# Altium PCB PCB1.PcbDoc
Units mil, origin at the board's own origin, x right, y up, seen from the top; angles counter-clockwise.
Board outline 6000 x 4000 mil, 2 copper layers (Top Layer, Bottom Layer); 30 components, 46 nets, 130 pads, 0 vias.
Unrouted connection lines stored in the file: 79.
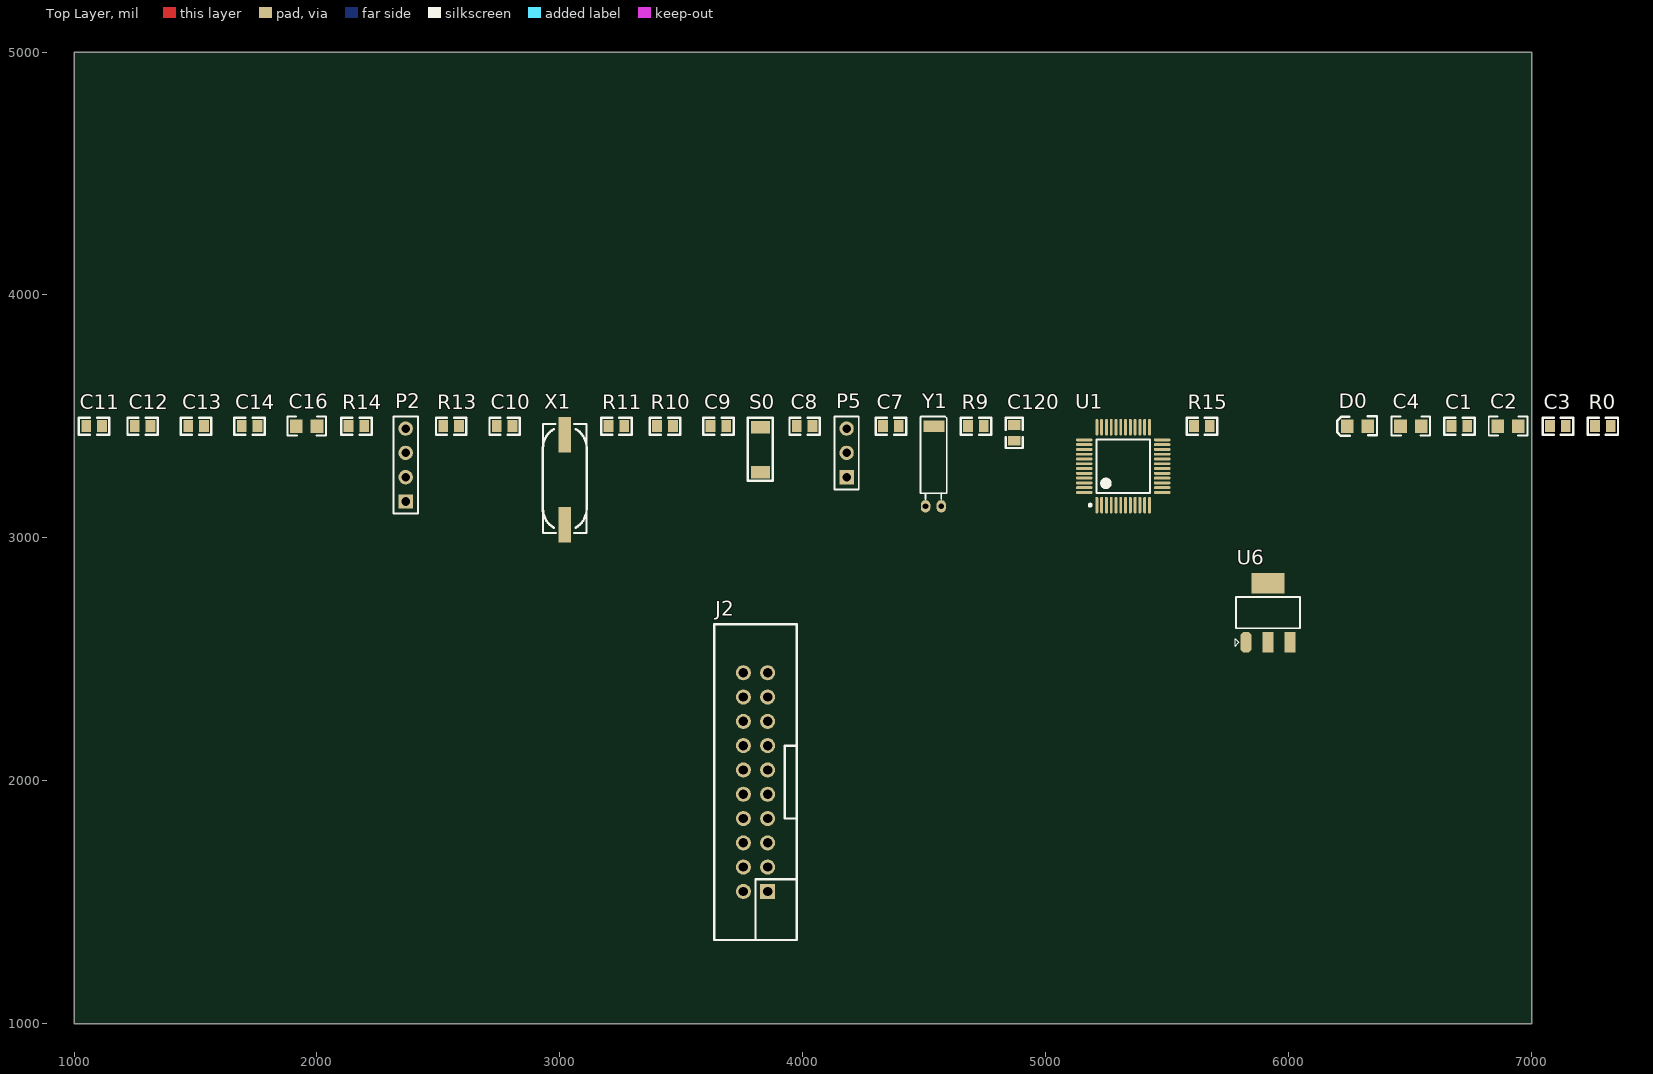
[diagram p0: Top Layer view]
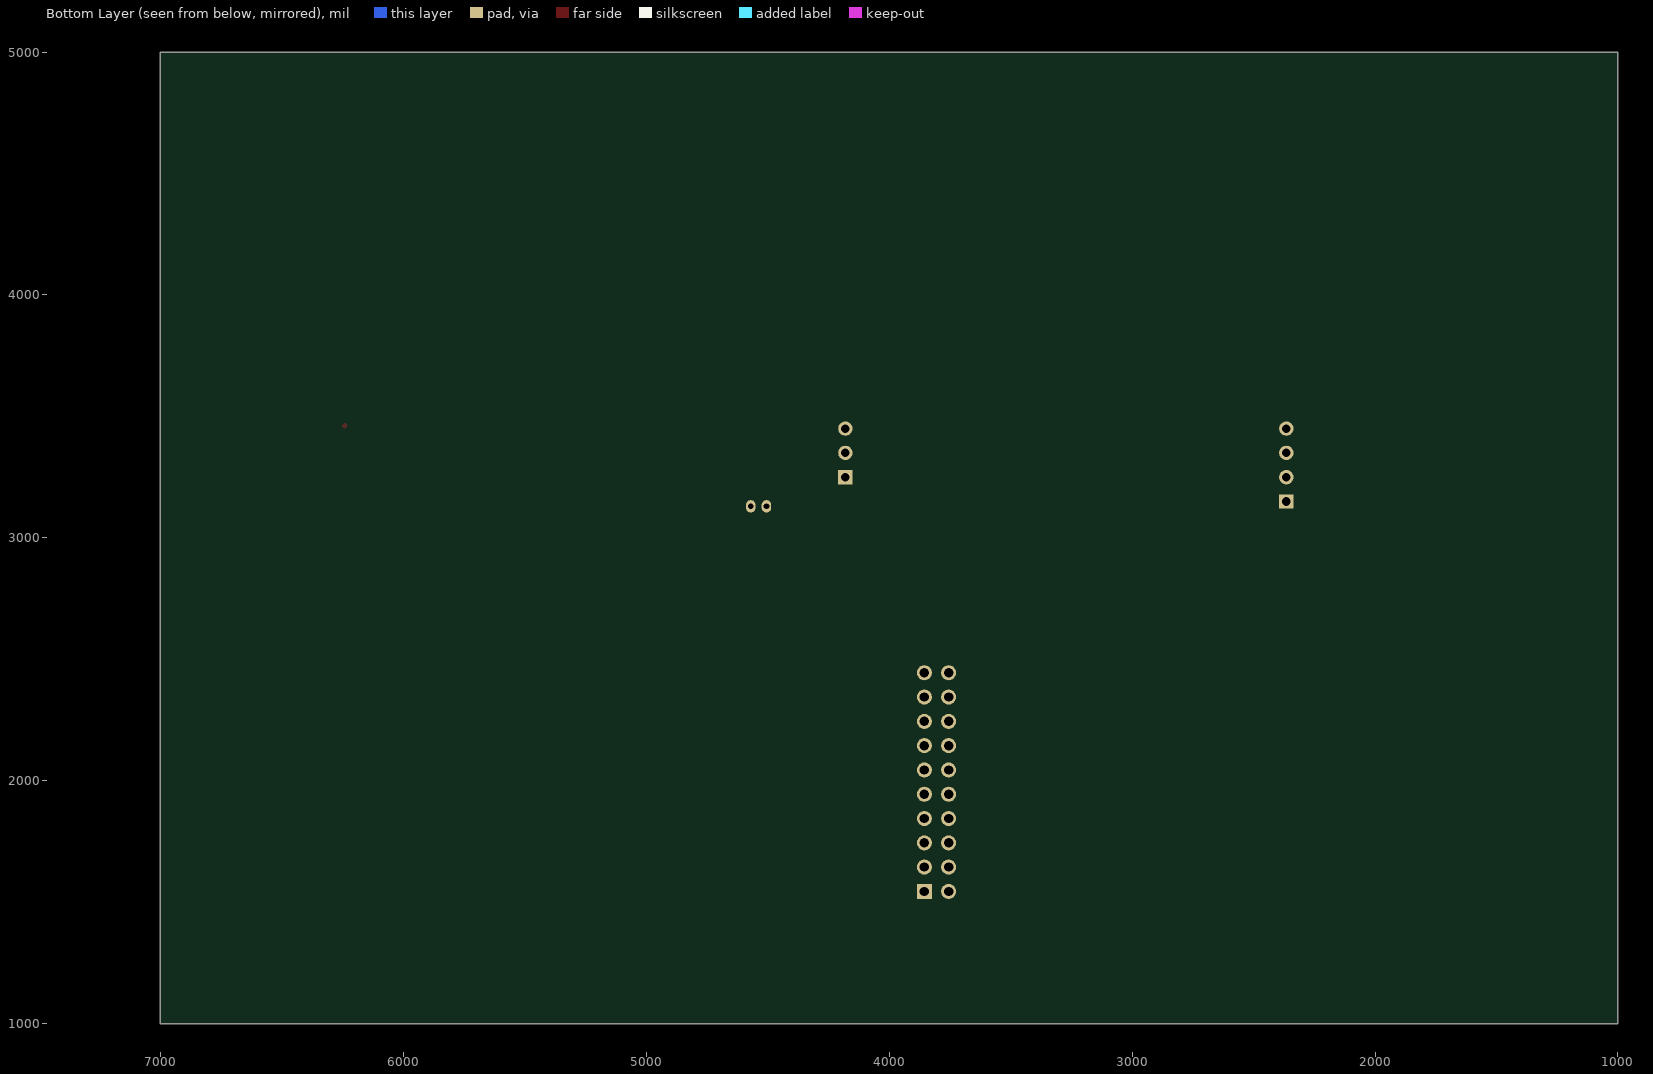
[diagram p1: Bottom Layer view, seen from below]

## Layer stack, top to bottom
Top Solder: solder mask 0.4, Solder Resist, Dk 3.5
Top Layer: signal copper 1.4
Dielectric 1: dielectric 12.6, FR-4, Dk 4.8
Bottom Layer: signal copper 1.4
Bottom Solder: solder mask 0.4, Solder Resist, Dk 3.5

## Board outline
1000,1000 7000,1000 7000,5000 1000,5000

## Design rules (kind name [scope] priority, off if disabled: settings)
Clearance [All] p1: gap=10 ignorepadtopadclearanceinfootprint=FALSE except(0: Arc-Hole Track-Hole SMDPad-Hole THPad-Hole Via-Hole Fill-Hole Poly-Hole Region-Hole Text-Hole)
PolygonConnect [All] p1: connectstyle=Relief reliefconductorwidth=10 reliefentries=4 polygonreliefangle="90 Angle" airgapwidth=10
RoutingVias [All] p1: holewidth=28 width=50 viastyle="Through Hole" minholewidth=28 minwidth=50 maxholewidth=28 maxwidth=50
SolderMaskExpansion [All] p1: expansion=4
Width [All] p1: maxlimit=10 minlimit=10 preferedwidth=10
30 further rules are at their usual default settings.

## Components (designator, comment, footprint, x,y, rotation, side; value= is the part's Value field where it differs from the comment)
C1 "104" RC0603 6670,3460 r0 top
C2 "10uF" RC0805 6860,3460 r0 top
C3 "104" RC0603 7075,3460 r0 top
C4 "10uF" RC0805 6460,3460 r0 top
C7 "104" RC0603 4330,3460 r0 top value=100nF
C8 "15P" RC0603 3975,3460 r0 top
C9 "22pF" RC0603 3620,3460 r0 top value=20pF
C10 "22pF" RC0603 2740,3460 r0 top value=20pF
C11 "104" RC0603 1050,3460 r0 top value=100nF
C12 "104" RC0603 1250,3460 r0 top value=100nF
C13 "104" RC0603 1470,3460 r0 top value=100nF
C14 "104" RC0603 1690,3460 r0 top value=100nF
C16 "106" RC0805 1915,3460 r0 top value=100nF
C120 "15P" RC0603 4870,3400 r90 top
D0 "LED0" LED0805 6325,3460 r0 top
J2 "" JTAG20P 3855,1545 r90 top
P2 "Header 4" HDR1X4 2365,3150 r90 top
P5 "Header 3" HDR1X3 4180,3250 r90 top
R0 "510R" RC0603 7260,3460 r0 top
R9 "0R" RC0603 4680,3460 r0 top
R10 "10K" RC0603 3400,3460 r0 top
R11 "1M" RC0603 3200,3460 r0 top
R13 "0R" RC0603 2520,3460 r0 top
R14 "10K" RC0603 2130,3460 r0 top
R15 "10K" RC0603 5610,3460 r0 top
S0 "SW-SPST" SMT-KEY 3825,3270 r0 top
U1 "STM32F103C8T6" LQFP48 5210,3135 r0 top
U6 "AMS1117-3.3" SOT223 5823.9,2570 r0 top
X1 "8M" SMD49S 3020,3055 r90 top value=8MHz
Y1 "32.768K" JZ32768 4505,3130 r0 top

## Footprints (in the part's own frame and the unit in brackets; to place one, negate y for a bottom-side part, rotate by r counter-clockwise, add the part's x,y. Pads: shape width x height; smd on the part's side, far side on the other; paste and mask are expansions set on the pad)
HDR1X3 [mm] "Connector; Header; 3 Position"
  rect 1.5x1.5 hole 0.9: 1(0,0)
  round 1.5 hole 0.9: 2(2.54,0) 3(5.08,0)
  silkscreen extent -1.27,-1.27 6.35,1.27
HDR1X4 [mm] "Connector; Header; 4 Position"
  rect 1.5x1.5 hole 0.9: 1(0,0)
  round 1.5 hole 0.9: 2(2.54,0) 3(5.08,0) 4(7.62,0)
  silkscreen extent -1.27,-1.27 8.89,1.27
JTAG20P [mil]
  rect 62x62 hole 38: 1(0,0)
  round 62 hole 38: 2(0,100) 3(100,0) 4(100,100) 5(200,0) 6(200,100) 7(300,0) 8(300,100) 9(400,0) 10(400,100) 11(500,0) 12(500,100) 13(600,0) 14(600,100) 15(700,0) 16(700,100) 17(800,0) 18(800,100) 19(900,0) 20(900,100)
  silkscreen extent -200,-120 1100,220
JZ32768 [mm]
  oval 1x1.3 hole 0.6: 1(0,0) 2(1.64,0)
  rect 2.2x1.2 smd: 3(0.875,8.382)
  silkscreen extent -0.53,0.76 2.2,9.4
LED0805 [mil]
  rect 52x56 smd: 1(0,0) 2(-84,0)
  Top Layer lines w20: -86,2 -84,0
  silkscreen extent -125,-40 38,40
LQFP48 [mm]
  oval 0.3x1.75 smd: 1(0,0) 2(0.5,0) 3(1,0) 4(1.5,0) 5(2,0) 6(2.5,0) 7(3,0) 8(3.5,0) 9(4,0) 10(4.5,0) 11(5,0) 12(5.5,0) 25(5.5,8.15) 26(5,8.15) 27(4.5,8.15) 28(4,8.15) 29(3.5,8.15) 30(3,8.15) 31(2.5,8.15) 32(2,8.15) 33(1.5,8.15) 34(1,8.15) 35(0.5,8.15) 36(0,8.15)
  oval 1.75x0.3 smd: 13(6.825,1.325) 14(6.825,1.825) 15(6.825,2.325) 16(6.825,2.825) 17(6.825,3.325) 18(6.825,3.825) 19(6.825,4.325) 20(6.825,4.825) 21(6.825,5.325) 22(6.825,5.825) 23(6.825,6.325) 24(6.825,6.825) 37(-1.325,6.825) 38(-1.325,6.325) 39(-1.325,5.825) 40(-1.325,5.325) 41(-1.325,4.825) 42(-1.325,4.325) 43(-1.325,3.825) 44(-1.325,3.325) 45(-1.325,2.825) 46(-1.325,2.325) 47(-1.325,1.825) 48(-1.325,1.325)
  silkscreen extent -0.82,-0.12 5.55,6.88
RC0603 [mil]
  rect 40x50 smd: 1(0,0) 2(65,0)
  silkscreen extent -30,-35 95,35
RC0805 [mil]
  rect 52x56 smd: 1(0,0) 2(85,0)
  silkscreen extent -37,-39 122,39
SMD49S [mil]
  rect 146x51 smd: 1(0,0) 2(370,0)
  silkscreen extent -35,-90 413,90
SMT-KEY [mm]
  rect 2x1.3 smd paste+0 mask+0.2: 1(0,0) 2(0,4.7)
  silkscreen extent -1.3,-0.89 1.3,5.72
SOT223 [mm]
  oct 1.1x2.15 smd: 1(0,0)
  rect 1.1x2.15 smd: 2(2.3,0) 3(4.6,0)
  rect 3.5x2.15 smd: 4(2.3,6.2)
  silkscreen extent -1.14,-0.38 5.65,4.72

## Part data
C1: library part CAP, "Capacitor"
C2: library part "CAPACITOR POL", "Capacitor"
C3: library part Cap, "Capacitor", LatestRevisionDate=17-Jul-2002, LatestRevisionNote="Re-released for DXP Platform.", PackageReference=RAD-0.3, Published=8-Jun-2000, Publisher="Altium Limited"
C4: library part ELECTRO2
C7 C9 C10 C11 C12 C13 C14 C16: library part CAP1, "Capacitor", Tolerate=50V, PCB_Layout="Top Layer SMC", Publisher=ZL_A0OFFICE, Revision=2012-3-28
  C7 C11 C12 C13 C14 C16: ERP=0103020075, TOL=10%
  C9 C10: ERP=0103020090, TOL=2%
C8 C120: library part CAP
D0: "Typical INFRARED GaAs LED"
J2: library part "Header 10X2H", "Header, 10-Pin, Dual row, Right Angle", LatestRevisionDate=17-Jul-2002, LatestRevisionNote="Re-released for DXP Platform.", Publisher="Altium Limited"
P2: "Header, 4-Pin", LatestRevisionDate=17-Jul-2002, LatestRevisionNote="Re-released for DXP Platform.", Publisher="Altium Limited"
P5: "Header, 3-Pin", LatestRevisionDate=17-Jul-2002, LatestRevisionNote="Re-released for DXP Platform.", Publisher="Altium Limited"
R0 R9 R10 R11 R13 R14 R15: library part R
S0: "Single-Pole, Single-Throw Switch"
U6: library part LT1085CM-3.3
X1: library part XTAL_SMD, "Crystal Oscillator", Tolerate="ROSON -20_+70 20pf", ERP=0103040021, PCB_Layout="Top Layer SMC", Publisher=ZL_A0OFFICE, Revision=2012-3-28, TOL=±20ppm
Y1: library part CRYSTAL, "晶振"

## Nets (pads, with @x,y where several pads share a name; then routed paths per layer and width w, separated by ;. In a path a pad name is that pad's centre, name@x,y a point inside that pad or via, vN(x,y) a via of type N, cw(c..) or ccw(c..) an arc to the next point about the centre after c; other vN are vias at no path point)
3V3: C2.1 C3.1 C11.1 C12.1 C13.1 C14.1 C16.1 J2.1 J2.2 R0.2 R9.2 R13.2 R15.2 U1.24 U1.36 U1.48 U6.2
5V: C1.1 C4.1 U6.3
BOOT0: R10.2 U1.44
GND: C1.2 C2.2 C3.2 C4.2 C7.2 C8.1 C9.2 C10.2 C11.2 C12.2 C13.2 C14.2 C16.2 C120.1 D0.2 J2.4 J2.6 J2.8 J2.10 J2.12 J2.14 J2.16 J2.18 J2.20 P2.3 P5.3 R10.1 R14.2 S0.2 U1.8 U1.23 U1.35 U1.47 U6.1
NetC9_1: C9.1 R11.2 U1.5 X1.2
NetC10_1: C10.1 R11.1 U1.6 X1.1
NetD0_1: D0.1 R0.1
NRST: C7.1 J2.15 R15.1 S0.1 U1.7
PA0: U1.10
PA1: U1.11
PA2: U1.12
PA3: U1.13
PA4: U1.14
PA5: P2.2 U1.15
PA6: U1.16
PA7: P2.1 U1.17
PA8: U1.29
PA9: U1.30
PA10: U1.31
PA11: U1.32
PA12: U1.33
PB0: U1.18
PB1: U1.19
PB2: R14.1 U1.20
PB5: U1.41
PB6: U1.42
PB7: U1.43
PB8: U1.45
PB9: P5.2 U1.46
PB10: U1.21
PB11: U1.22
PB12: U1.25
PB13: U1.26
PB14: U1.27
PB15: U1.28
PC13: U1.2
PC14: C120.2 U1.3 Y1.2
PC15: C8.2 U1.4 Y1.1
TCLK: J2.9 U1.37
TDI/PA15: J2.5 U1.38
TDO/PB3: J2.13 U1.39
TMS: J2.7 U1.34
TRST/PB4: J2.3 U1.40
VBAT: R9.1 U1.1
VCC: P2.4 P5.1
VDDA: R13.1 U1.9
pads on no net: J2.11 J2.17 J2.19 U6.4 Y1.3